# Altium PCB PCB1.PcbDoc
Units mm, origin at the board's own origin, x right, y up, seen from the top; angles counter-clockwise.
Board outline 58 x 82 mm, 2 copper layers (Top Layer, Bottom Layer); 39 components, 48 nets, 183 pads, 26 vias.
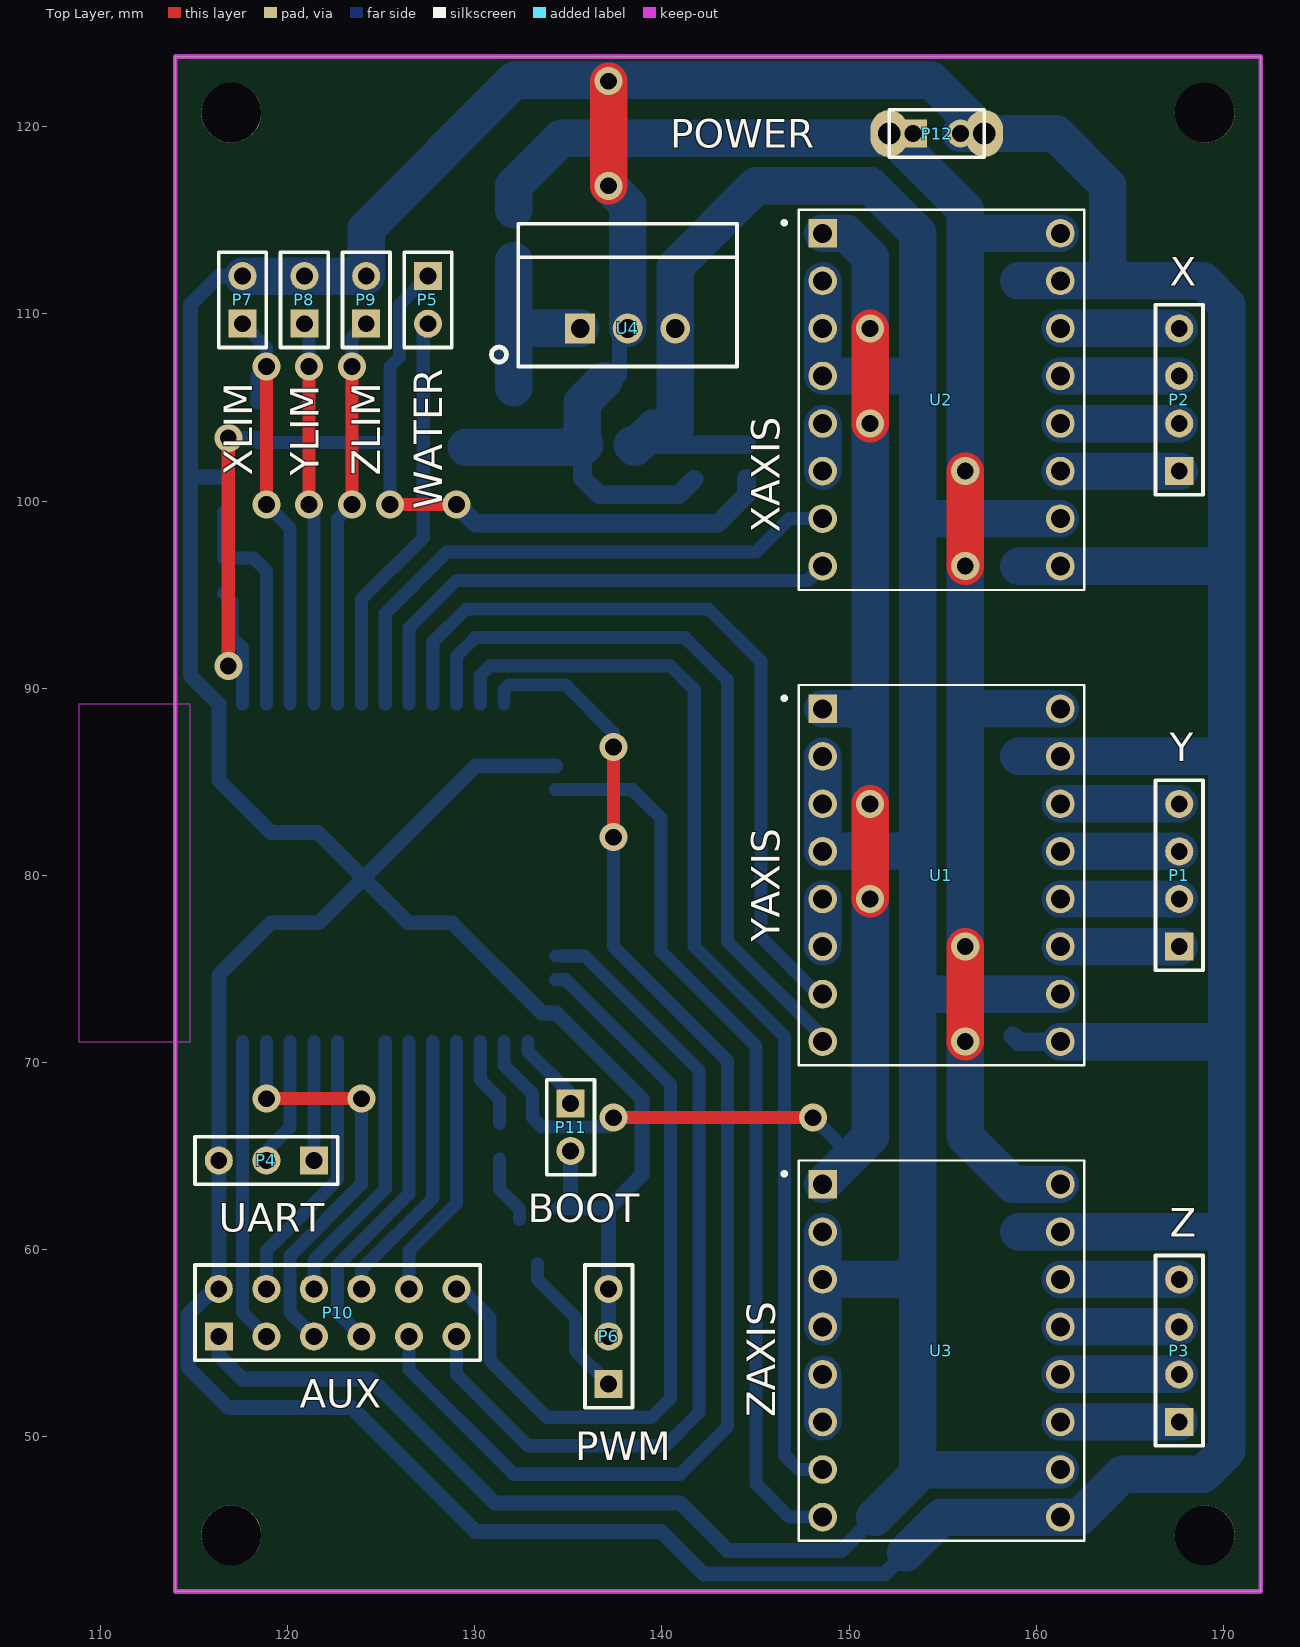
[diagram p0: Top Layer view]
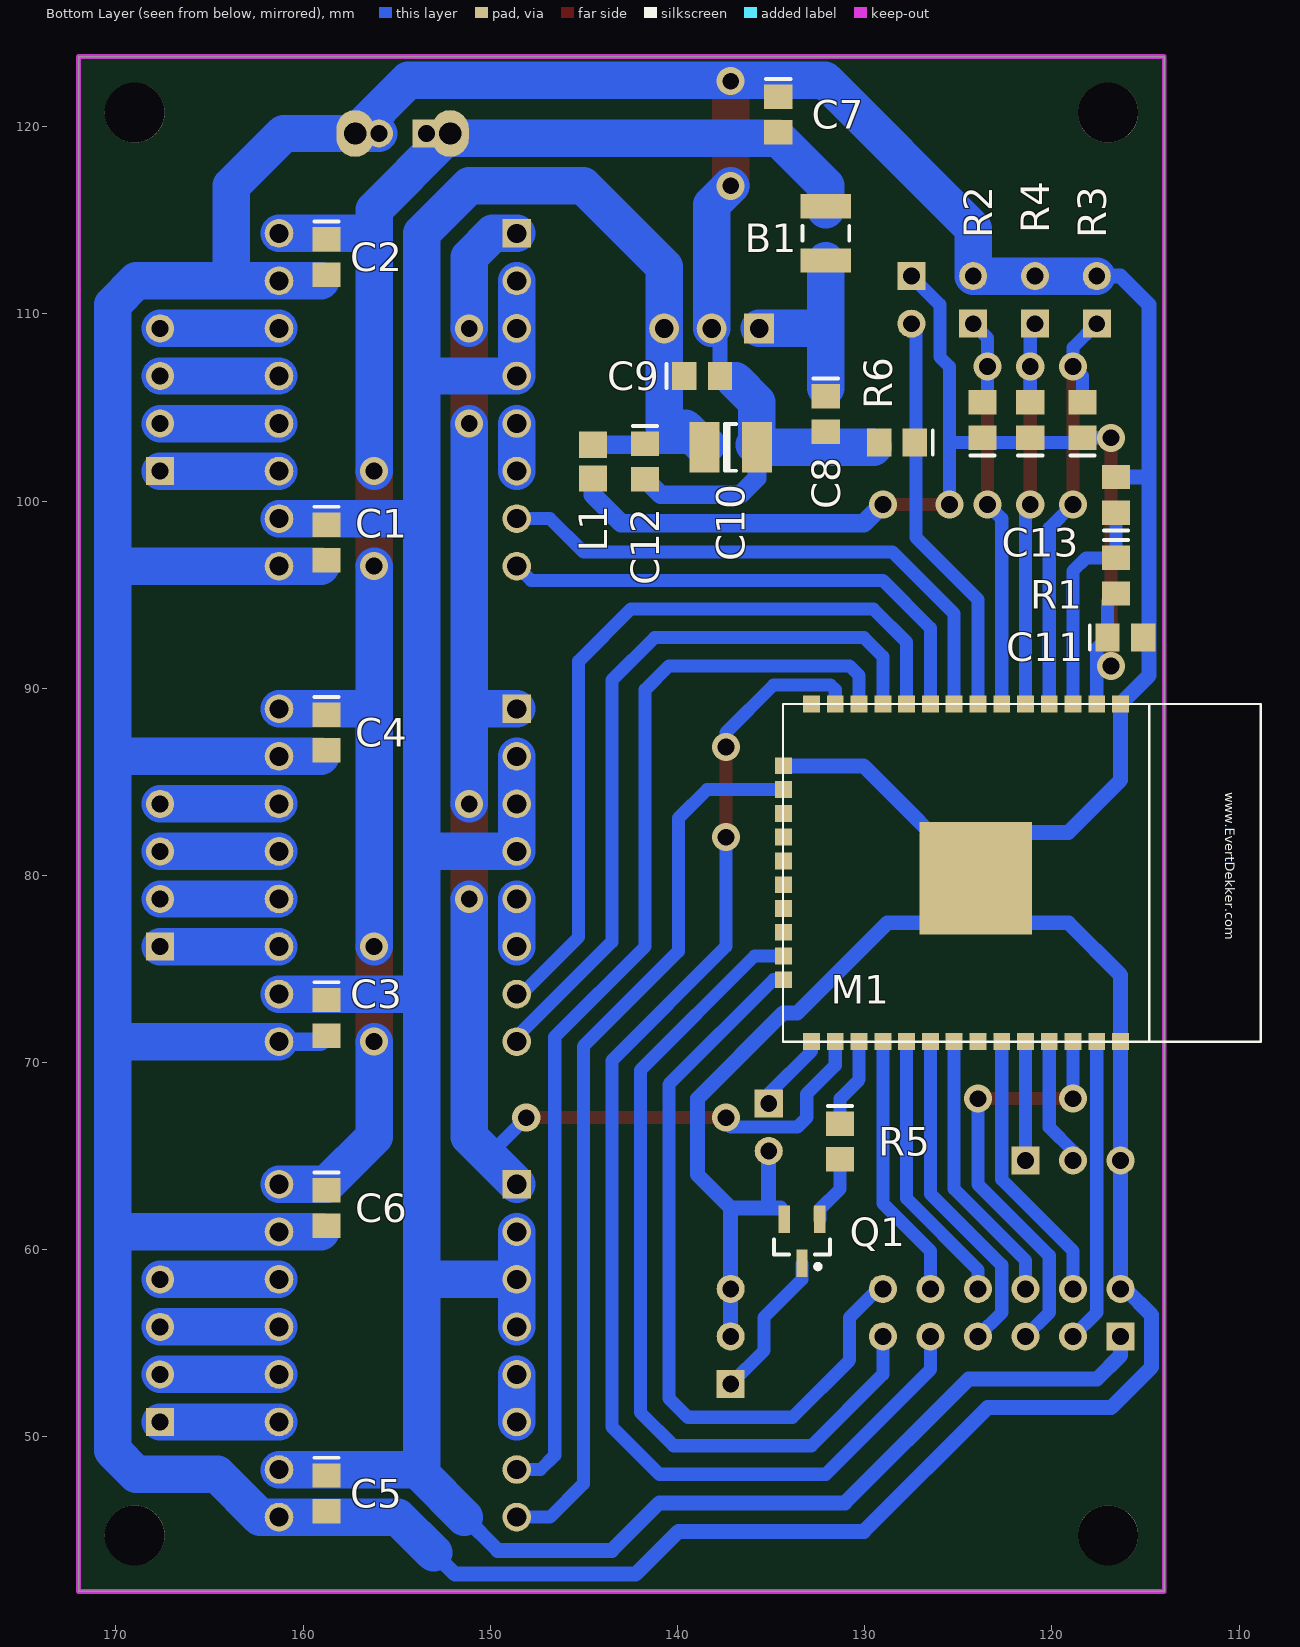
[diagram p1: Bottom Layer view, seen from below]

## Layer stack, top to bottom
Top Solder: solder mask 0.0102, Solder Resist, Dk 3.5
Top Layer: signal copper 0.0356
Dielectric 1: dielectric 0.32, FR-4, Dk 4.8
Bottom Layer: signal copper 0.0356
Bottom Solder: solder mask 0.0102, Solder Resist, Dk 3.5

## Board outline
114,41.746 114,123.746 172,123.746 172,41.746

## Design rules (kind name [scope] priority, off if disabled: settings)
Clearance Clearance_1 [All vs InPolygon] p1: gap=0.3
Clearance [All] p2: gap=0.15
Height [All] p1: minheight=0 maxheight=50 prefheight=12.7
HoleSize [All] p1: absolutevalues=TRUE maxlimit=4.2 minlimit=0.025 maxpercent=80.000 minpercent=20.000
PolygonConnect [ispad] p1: connectstyle=Relief reliefconductorwidth=0.254 reliefentries=4 polygonreliefangle="90 Angle" airgapwidth=0.254
PolygonConnect PolygonConnect_1 [All] p2: connectstyle=Direct reliefconductorwidth=0.254 reliefentries=4 polygonreliefangle="90 Angle" airgapwidth=0.254
RoutingVias [All] p1: holewidth=0.3 width=0.6 viastyle="Through Hole" minholewidth=0.2 minwidth=0.5 maxholewidth=3.81 maxwidth=5.08
SilkToSolderMaskClearance SilkscreenOverComponentPads [IsPad] p1: minsilkscreentomaskgap=0.254 clearancetoexposedcopper=TRUE
SolderMaskExpansion [All] p1: expansion=0.102
UnpouredPolygon [All] p1: allowunpoured=FALSE
Width [All] p1: maxlimit=10 minlimit=0.15 preferedwidth=0.3 minimp=50.000000 maximp=50.000000 favimp=50.000000
26 further rules are at their usual default settings.

## Components (designator, comment, footprint, x,y, rotation, side; value= is the part's Value field where it differs from the comment)
B1 "Ferrite" INDC3225N 132.08,114.3 r90 bottom
C1 "Cap Semi" 0805 158.75,97.79 r270 bottom
C2 "Cap Semi" 0805 158.75,113.03 r270 bottom
C3 "Cap Semi" 0805 158.75,72.39 r270 bottom
C4 "Cap Semi" 0805 158.75,87.63 r270 bottom
C5 "Cap Semi" 0805 158.75,46.99 r270 bottom
C6 "Cap Semi" 0805 158.75,62.23 r270 bottom
C7 "Cap Semi" 0805 134.62,120.65 r270 bottom
C8 "Cap Semi" 0805 132.08,104.648 r270 bottom
C9 "Cap Semi" 0805 138.684,106.68 r180 bottom
C10 "Cap Semi" 1210 137.16,102.87 r180 bottom
C11 "Cap Semi" 0805 116.078,92.71 r180 bottom
C12 "Cap Semi" 0805 141.732,102.108 r270 bottom
C13 "Cap Semi" 0805 116.586,100.33 r90 bottom
L1 "Ferrite" INDC2012N 144.526,102.108 r90 bottom
M1 "ESP32S_Module" ESP32S 134.366,89.154 r270 bottom
P1 "Y" HDR1X4 167.64,76.2 r90 top
P2 "X" HDR1X4 167.64,101.6 r90 top
P3 "Z" HDR1X4 167.64,50.8 r90 top
P4 "UART" HDR1X3 121.412,64.77 r180 top
P5 "WATER" HDR1X2 127.508,112.014 r270 top
P6 "PWM" HDR1X3 137.16,52.832 r90 top
P7 "XLIM" HDR1X2 117.602,109.474 r90 top
P8 "YLIM" HDR1X2 120.904,109.474 r90 top
P9 "ZLIM" HDR1X2 124.206,109.474 r90 top
P10 "AUX" HDR2X6 116.332,55.372 r0 top
P11 "BOOT" HDR1X2 135.128,67.818 r270 top
P12 "POWER" HDR1X2 153.416,119.634 r0 top
Q1 "BSS123A" SOT23_M 133.35,60.452 r270 bottom
R1 "Res2" 0805 116.586,96.012 r270 bottom
R2 "Res2" 0805 123.698,104.328 r90 bottom
R3 "Res2" 0805 118.364,104.328 r90 bottom
R4 "Res2" 0805 121.158,104.328 r90 bottom
R5 "Res2" 0805 131.318,65.786 r270 bottom
R6 "Res2" 0805 128.27,103.124 r0 bottom
U1 "YAXIS" MODULE_A4988_STEPPER_MOTOR_DRIVER_CARRIER 154.94,80.01 r0 top
U2 "XAXIS" MODULE_A4988_STEPPER_MOTOR_DRIVER_CARRIER 154.94,105.41 r0 top
U3 "ZAXIS" MODULE_A4988_STEPPER_MOTOR_DRIVER_CARRIER 154.94,54.61 r0 top
U4 "3V3REG" TRS1-24xx 138.176,109.22 r0 top

## Footprints (in the part's own frame and the unit in brackets; to place one, negate y for a bottom-side part, rotate by r counter-clockwise, add the part's x,y. Pads: shape width x height; smd on the part's side, far side on the other; paste and mask are expansions set on the pad)
0805 [mm] "Chip Capacitor; Body 2.0 x 1.2 mm (LxW typ)"
  rect 1.3x1.5 smd: 1(-0.95,0) 2(0.95,0)
  silkscreen extent -1.9,-0.65 -1.9,0.65
1210 [mm] "Chip Capacitor; Body 3.2 x 2.5 mm (LxW typ)"
  rect 1.6x2.7 smd: 1(-1.4,0) 2(1.4,0)
  silkscreen extent -0.3,-1.25 0.3,1.25, body extent -1.37,-1.3 1.42,1.32, height 2.5
ESP32S [mm] "ESP32S-Module"
  rect 0.9x0.9 smd: 1(0,18.034) 2(0,16.764) 3(0,15.494) 4(0,14.224) 5(0,12.954) 6(0,11.684) 7(0,10.414) 8(0,9.144) 9(0,7.874) 10(0,6.604) 11(0,5.334) 12(0,4.064) 13(0,2.794) 14(0,1.524) 15(3.3,0.034) 16(4.57,0.034) 17(5.84,0.034) 18(7.11,0.034) 19(8.38,0.034) 20(9.65,0.034) 21(10.92,0.034) 22(12.19,0.034) 23(13.46,0.034) 24(14.73,0.034) 25(18.034,1.524) 26(18.034,2.794) 27(18.034,4.064) 28(18.034,5.334) 29(18.034,6.604) 30(18.034,7.874) 31(18.034,9.144) 32(18.034,10.414) 33(18.034,11.684) 34(18.034,12.954) 35(18.034,14.224) 36(18.034,15.494) 37(18.034,16.764) 38(18.034,18.034)
  rect 6x6 smd: 101(9.3,10.3)
  Keep-Out Layer region: 0,25.527 18.034,25.527 18.034,19.558 0,19.558
  silkscreen extent 0,0 18.03,25.53, body extent 0,0 18.03,25.53, height 2
HDR1X2 [mm] "Connector; Header; 2 Position"
  rect 1.5x1.5 hole 0.9: 1(0,0)
  round 1.5 hole 0.9: 2(2.54,0)
  silkscreen extent -1.27,-1.27 3.81,1.27
HDR1X3 [mm] "Connector; Header; 3 Position"
  rect 1.5x1.5 hole 0.9: 1(0,0)
  round 1.5 hole 0.9: 2(2.54,0) 3(5.08,0)
  silkscreen extent -1.27,-1.27 6.35,1.27
HDR1X4 [mm] "Connector; Header; 4 Position"
  rect 1.5x1.5 hole 0.9: 1(0,0)
  round 1.5 hole 0.9: 2(2.54,0) 3(5.08,0) 4(7.62,0)
  silkscreen extent -1.27,-1.27 8.89,1.27
HDR2X6 [mm] "Connector; Header; 6x2 Position"
  rect 1.5x1.5 hole 0.9: 1(0,0)
  round 1.5 hole 0.9: 2(0,2.54) 3(2.54,0) 4(2.54,2.54) 5(5.08,0) 6(5.08,2.54) 7(7.62,0) 8(7.62,2.54) 9(10.16,0) 10(10.16,2.54) 11(12.7,0) 12(12.7,2.54)
  silkscreen extent -1.27,-1.27 13.97,3.81
INDC2012N [mm] "Chip Inductor, Body 2.0x1.2mm, IPC Medium Density"
  rect 1.4x1.5 smd: 1(0.9,0) 2(-0.9,0)
  body extent -1.1,-0.7 1.1,0.7, height 1.1
INDC3225N [mm] "Chip Inductor, Body 3.2x2.5mm, IPC Medium Density"
  rect 1.3x2.7 smd: 1(1.45,0) 2(-1.45,0)
  silkscreen extent -0.4,-1.25 0.4,1.25, body extent -1.35,-1.7 1.35,1.7, height 1.5
MODULE_A4988_STEPPER_MOTOR_DRIVER_CARRIER [mm]
  rect 1.53x1.53 hole 1.02: 1(-6.35,8.89)
  round 1.53 hole 1.02: 2(-6.35,6.35) 3(-6.35,3.81) 4(-6.35,1.27) 5(-6.35,-1.27) 6(-6.35,-3.81) 7(-6.35,-6.35) 8(-6.35,-8.89) 9(6.35,-8.89) 10(6.35,-6.35) 11(6.35,-3.81) 12(6.35,-1.27) 13(6.35,1.27) 14(6.35,3.81) 15(6.35,6.35) 16(6.35,8.89)
  silkscreen extent -8.5,-10.16 7.62,10.16
SOT23_M [mm] "SOT23, 3-Leads, Body 2.9x1.3mm, Pitch 0.95mm, Lead Span 2.3mm - Reverse Pinning, IPC Low Density"
  rect 1.45x0.6 smd: 1(1.175,0) 2(-1.175,-0.95) 3(-1.175,0.95)
  silkscreen extent -0.1,-1.5 1.47,1.5, body extent -0.7,-1.5 0.7,1.5, height 1.1
TRS1-24xx [mm] "Switching Regulator,18-32Vin,5Vout 1A"
  rect 1.6x1.6 hole 1: 1(-2.54,0)
  round 1.6 hole 1: 2(0,0) 3(2.54,0)
  silkscreen extent -7.28,-2.03 5.84,5.59, body extent -5.84,-2.03 5.84,5.59, height 10.2

## Part data
B1: library part Inductor, "Inductor"
C1 C2 C3 C4 C5 C6 C7 C8 C9 C10 C11 C12 C13: "Capacitor (Semiconductor SIM Model)"
L1: library part "Inductor Iron", "Magnetic-Core Inductor"
M1: "Esp-32S"
P1 P2 P3: library part "Header 4", "Header, 4-Pin"
P4 P6: library part "Header 3", "Header, 3-Pin"
P5 P7 P8 P9 P11 P12: library part "Header 2", "Header, 2-Pin"
P10: library part "Header 6X2", "Header, 6-Pin, Dual row"
Q1: "N-Channel Enhancement Mode Vertical DMOS FET"
R1 R2 R3 R4 R5 R6: "Resistor"
U1 U2 U3: library part A4988_STEPPER_MOTOR_DRIVER_CARRIER, "Stepper Motor Driver"
U4: library part TSR1-2433, "Switching Regulator,18-32Vin,3.3Vout 1A"

## Free pads (board coordinates)
  round 3.2 hole 3.2: 0(169,44.746) 1(117,44.746) 2(117,120.746) 3(169,120.746)
  oval 2x2.5 hole 1.2: 4(152.146,119.634) 4(157.226,119.634)

## Via types
v1: diameter 1.5, hole 0.9, Top Layer to Bottom Layer, tented both sides, 26 vias

## Nets (pads, with @x,y where several pads share a name; then routed paths per layer and width w, separated by ;. In a path a pad name is that pad's centre, name@x,y a point inside that pad or via, vN(x,y) a via of type N, cw(c..) or ccw(c..) an arc to the next point about the centre after c; other vN are vias at no path point)
BOOT: M1.25 P11.1 | length 4.2
  Bottom Layer w0.7: M1.25 132.842,70.612 135.128,68.326 P11.1
GND: C1.2 C2.2 C3.2 C4.2 C5.2 C6.2 C7.1 C8.2 C9.2 C10.2 C11.2 C12.2 C13.2 M1.1 M1.15 M1.38 M1.101 P4.3 P6.2 P6.3 P7.2 P8.2 P9.2 P10.2 P11.2 P12.2 pad.4@157.226,119.634 Q1.2 R6.2 U1.9 U1.15 U2.9 U2.15 U3.9 U3.15 U4.2 | length 400.1
  Top Layer w2: v1(137.16,116.84) v1(137.16,122.428)
  Bottom Layer w0.8: 114.996,101.28 C13.2 ; P7.2 116.332,112.014 114.808,110.49 114.808,90.678 M1.1 116.332,85.09 119.126,82.296 121.624,82.296 M1.101 ; M1.15 130.066,85.854 M1.101 ; Q1.2@134.488,62.23 135.128,62.23 ; P11.2 135.128,62.23 ; P6.2 P6.3 137.16,62.23 ; C9.2 U4.2@137.734,108.778 ; 153.035,43.815 151.892,42.672 142.24,42.672 139.954,44.958 130.048,44.958 123.444,51.562 116.84,51.562 114.677,53.725 114.677,56.511 116.078,57.912 P10.2 P4.3 M1.38 116.332,74.676 119.126,77.47 121.682,77.47 M1.101 ; M1.101 126.45,77.47 128.778,77.47 133.604,72.644 134.366,72.644 138.938,68.072 138.938,64.008 137.16,62.23 ; 135.128,62.23 137.16,62.23
  Bottom Layer w1: C10.2 135.76,101.222 136.652,100.33 140.904,100.33 C12.2 ; C3.2 159.07,71.12 U1.9
  Bottom Layer w2: P7.2 P8.2 P9.2 124.206,114.554 132.121,122.469 154.391,122.469 pad.4@157.226,119.634 ; R6.2@129.54,102.87 C10.2 ; C10.2@135.89,103 C10.2 ; 136.906,106.426 135.76,105.28 C10.2 ; v1(137.16,116.84) 138.176,115.824 U4.2 ; 153.035,43.815 154.94,45.72 U3.9 162.306,45.72 164.592,48.006 168.91,48.006 170.18,49.276 170.18,60.96 ; P12.2 161.036,119.634 163.83,116.84 163.83,111.76 ; C6.2@159.07,60.96 U3.15 170.18,60.96 ; C4.2@159.07,86.36 U1.15 170.18,86.36 ; C1.2@159.07,96.52 U2.9 170.18,96.52 ; C2.2@159.07,111.76 U2.15 168.91,111.76 170.18,110.49 170.18,96.52 ; U1.9 170.18,71.12 ; 170.18,60.96 170.18,71.12 ; 170.18,71.12 170.18,86.36 ; 170.18,86.36 170.18,96.52
GPIO2: M1.24 P10.12 | length 41.2
  Bottom Layer w0.7: P10.12 129.286,57.912 130.81,56.388 130.81,54.102 133.858,51.054 139.446,51.054 140.462,52.07 140.462,68.834 134.872,74.424 M1.24
GPIO14: M1.13 P10.9 | length 69.5
  Top Layer w0.7: v1(137.414,82.042) v1(137.414,86.868)
  Bottom Layer w0.7: P10.9 126.492,53.594 132.08,48.006 140.97,48.006 143.51,50.546 143.51,70.104 137.414,76.2 v1(137.414,82.042) ; M1.13 131.572,89.916 131.826,90.17 134.874,90.17 137.414,87.63 v1(137.414,86.868)
GPIO15: M1.23 P10.11 | length 45.8
  Bottom Layer w0.7: P10.11 129.032,53.34 132.842,49.53 140.208,49.53 141.986,51.308 141.986,69.596 135.888,75.694 M1.23
GPIO17: M1.28 P10.10 | length 14.3
  Bottom Layer w0.7: P10.10 126.492,59.944 129.032,62.484 M1.28
I2C_SCL: M1.36 P10.5 | length 22.9
  Top Layer w0.7: v1(118.872,68.072) v1(123.952,68.072)
  Bottom Layer w0.7: v1(118.872,68.072) M1.36 ; P10.5 120.142,56.642 120.142,59.69 123.952,63.5 v1(123.952,68.072)
I2C_SDA: M1.33 P10.4 | length 14.8
  Bottom Layer w0.7: P10.4 118.872,59.944 122.682,63.754 M1.33
MOT_EN: M1.26 U1.1 U2.1 U3.1 | length 79.1
  Top Layer w0.7: v1@137.668,67.056 v1(148.082,67.056)
  Top Layer w2: v1(151.13,78.74) v1(151.13,83.82) ; v1(151.13,104.14) v1(151.13,109.22)
  Bottom Layer w0.7: M1.26 131.572,69.85 133.096,68.326 133.096,67.056 133.584,66.568 137.18,66.568 v1@137.668,67.056 ; v1(148.082,67.056) 150.114,65.024
  Bottom Layer w2: U3.1 150.114,65.024 151.13,66.04 v1(151.13,78.74) ; U1.1 151.13,88.9 ; U2.1 149.86,114.3 151.13,113.03 v1(151.13,109.22) ; v1(151.13,83.82) 151.13,88.9 ; v1(151.13,104.14) 151.13,88.9
  other v1: 137.414,67.056
NetB1_2: B1.2 C8.1 U4.1 | length 10.4
  Bottom Layer w2: C8.1@132.08,106.04 132.08,109.22 ; B1.2 132.08,109.22 ; U4.1 132.08,109.22
NetC13_1: C13.1 M1.3 R1.1 | length 12.1
  Bottom Layer w0.7: C13.1 R1.1 118.176,96.962 118.872,96.266 M1.3
NetM1_7: M1.7 P5.2 R6.1 | length 21.8
  Bottom Layer w0.7: M1.7 123.952,94.742 127.254,98.044 127.254,109.22 P5.2
NetM1_34: M1.34 P4.1 | length 6.3
  Bottom Layer w0.7: P4.1 M1.34
NetM1_35: M1.35 P4.2 | length 6.9
  Bottom Layer w0.7: P4.2 118.872,65.278 120.142,66.548 M1.35
NetP1_1: P1.1 U1.11 | length 6.3
  Bottom Layer w2: U1.11 P1.1
NetP1_2: P1.2 U1.12 | length 6.3
  Bottom Layer w2: U1.12 P1.2
NetP1_3: P1.3 U1.13 | length 6.3
  Bottom Layer w2: U1.13 P1.3
NetP1_4: P1.4 U1.14 | length 6.3
  Bottom Layer w2: U1.14 P1.4
NetP2_1: P2.1 U2.11 | length 6.3
  Bottom Layer w2: U2.11 P2.1
NetP2_2: P2.2 U2.12 | length 6.3
  Bottom Layer w2: U2.12 P2.2
NetP2_3: P2.3 U2.13 | length 6.3
  Bottom Layer w2: U2.13 P2.3
NetP2_4: P2.4 U2.14 | length 6.3
  Bottom Layer w2: U2.14 P2.4
NetP3_1: P3.1 U3.11 | length 6.3
  Bottom Layer w2: U3.11 P3.1
NetP3_2: P3.2 U3.12 | length 6.3
  Bottom Layer w2: U3.12 P3.2
NetP3_3: P3.3 U3.13 | length 6.3
  Bottom Layer w2: U3.13 P3.3
NetP3_4: P3.4 U3.14 | length 6.3
  Bottom Layer w2: U3.14 P3.4
NetP6_1: P6.1 Q1.1 | length 8
  Bottom Layer w0.7: Q1.1 133.35,58.42 135.382,56.388 135.382,54.61 P6.1
NetQ1_3: Q1.3 R5.2 | length 3.7
  Bottom Layer w0.7: R5.2 131.318,63.246 132.4,62.164 Q1.3
NetU1_5: U1.5 U1.6 | length 2.5
  Bottom Layer w2: U1.6 U1.5
NetU2_5: U2.5 U2.6 | length 2.5
  Bottom Layer w2: U2.6 U2.5
NetU3_5: U3.5 U3.6 | length 2.5
  Bottom Layer w2: U3.6 U3.5
PWM_LASER: M1.27 R5.1 | length 4.8
  Bottom Layer w0.7: M1.27 130.302,69.088 131.318,68.072 R5.1
SD_CLK: M1.30 P10.7 | length 17.9
  Bottom Layer w0.7: P10.7 122.682,56.642 122.682,59.182 126.492,62.992 M1.30
SD_MISO: M1.31 P10.6 | length 14.8
  Bottom Layer w0.7: P10.6 121.412,59.436 125.222,63.246 M1.31
SD_MOSI: M1.37 P10.3 | length 16.3
  Bottom Layer w0.7: M1.37 117.602,56.642 P10.3
SD_SS: M1.29 P10.8 | length 14.8
  Bottom Layer w0.7: P10.8 123.952,58.928 127.762,62.738 M1.29
VCC: C1.1 C3.1 C5.1 C9.1 C10.1 C12.1 L1.1 P10.1 U1.2 U1.3 U1.4 U1.10 U2.2 U2.3 U2.4 U2.10 U3.2 U3.3 U3.4 U3.10 U4.3 | length 197
  Bottom Layer w0.8: P10.1 116.332,54.356 117.602,53.086 124.46,53.086 131.064,46.482 140.97,46.482 143.51,43.942 149.606,43.942 151.384,45.72
  Bottom Layer w1: C10.1 138.698,103.008 L1.1
  Bottom Layer w2: C10.1@138.43,103 C10.1 ; C10.1@138.698,103.008 139.576,103.886 140.716,103.886 U4.3 140.716,112.522 145.034,116.84 151.13,116.84 153.67,114.3 153.67,99.06 ; U3.4 U3.3 ; U3.2 U3.3 ; U1.2 U1.3 U1.4 153.67,81.28 ; U2.2 U2.3 U2.4 153.67,106.68 ; 151.384,45.72 153.67,48.006 153.67,58.42 ; 153.67,48.26 U3.10 ; U1.10 153.67,73.66 ; U2.10 153.67,99.06 ; U3.3 153.67,58.42 ; 153.67,58.42 153.67,73.66 ; 153.67,73.66 153.67,81.28 ; 153.67,81.28 153.67,99.06
VCC_ESP: C11.1 L1.2 M1.2 P5.1 R1.2 R2.1 R3.1 R4.1 | length 62.4
  Top Layer w0.7: v1(116.84,91.186) v1(116.84,103.378) ; v1(125.476,99.822) v1(129.032,99.822)
  Bottom Layer w0.7: v1@116.586,91.186 117.602,91.186 ; R1.2 117.028,94.62 C11.1 117.602,92.136 117.602,91.186 ; v1@116.586,103.378 R3.1 ; M1.2 117.602,91.186 ; R3.1@118.364,103.124 125.476,103.124 ; v1(125.476,99.822) 125.476,107.188 125.984,107.696 125.984,110.49 P5.1
  Bottom Layer w1: v1(129.032,99.822) 130.048,98.806 143.002,98.806 144.526,100.33 L1.2
VMOT: B1.1 C2.1 C4.1 C6.1 C7.2 P12.1 pad.4@152.146,119.634 U1.16 U2.16 U3.16 | length 93.9
  Top Layer w2: v1(156.21,71.12) v1(156.21,76.2) ; v1(156.21,96.52) v1(156.21,101.6)
  Bottom Layer w2: B1.1@132.08,115.57 132.08,116.84 134.62,119.38 152.4,119.38 156.21,115.57 156.21,114.3 ; v1(156.21,71.12) 156.21,66.04 158.75,63.5 U3.16 ; v1(156.21,76.2) 156.21,88.9 ; v1(156.21,96.52) 156.21,88.9 ; v1(156.21,101.6) 156.21,114.3 ; U1.16 156.21,88.9 ; U2.16 156.21,114.3
XDIR: M1.9 U2.8 | length 27.5
  Bottom Layer w0.7: M1.9 126.492,93.218 129.032,95.758 147.828,95.758 U2.8
XLIM: M1.4 P7.1 R3.2 | length 23.5
  Top Layer w0.7: v1(118.872,99.822) v1(118.872,107.188)
  Bottom Layer w0.7: P7.1 118.872,108.204 v1(118.872,107.188) 118.364,106.68 R3.2 ; v1(118.872,99.822) 120.142,98.552 M1.4
XSTEP: M1.8 U2.7 | length 30.3
  Bottom Layer w0.7: M1.8 125.222,93.98 128.524,97.282 145.034,97.282 146.812,99.06 U2.7
YDIR: M1.11 U1.8 | length 40.2
  Bottom Layer w0.7: M1.11 129.032,91.694 130.048,92.71 141.224,92.71 143.51,90.424 143.51,76.454 148.59,71.374 148.336,71.12 U1.8
YLIM: M1.5 P8.1 R4.2 | length 22.9
  Top Layer w0.7: v1(121.158,99.822) v1(121.158,107.188)
  Bottom Layer w0.7: v1@120.904,99.822 121.412,99.314 M1.5 ; R4.2@120.904,105.024 R4.2 v1(121.158,107.188) 121.158,109.22 P8.1
YSTEP: M1.10 U1.7 | length 42
  Bottom Layer w0.7: M1.10 127.762,92.456 129.54,94.234 142.494,94.234 145.288,91.44 145.288,76.708 148.336,73.66 U1.7
ZDIR: M1.16 U3.8 | length 48.2
  Bottom Layer w0.7: M1.16 138.428,84.584 139.954,83.058 139.954,75.946 145.034,70.866 145.034,47.498 146.812,45.72 U3.8
ZLIM: M1.6 P9.1 R2.2 | length 23.1
  Top Layer w0.7: v1(123.444,99.822) v1(123.444,107.188)
  Bottom Layer w0.7: M1.6 122.682,99.06 v1(123.444,99.822) ; R2.2@123.444,105.024 v1(123.444,107.188) 123.444,108.712 P9.1
ZSTEP: M1.12 U3.7 | length 58.9
  Bottom Layer w0.7: M1.12 130.302,90.678 130.81,91.186 140.462,91.186 141.732,89.916 141.732,76.2 146.558,71.374 146.558,49.022 147.32,48.26 U3.7
pads on no net: M1.14 M1.17 M1.18 M1.19 M1.20 M1.21 M1.22 M1.32

## Keep-outs
Keep-Out Layer:
  the board outline again, w0.254

## Text inside footprints (layer, text, board x,y; h text height)
M1: Bottom Overlay "www.EvertDekker.com" at 110.744,84.455 h0.5 r90